# EAGLE board cleanup_test01.out (EAGLE 7.2.0)

Size 160 x 100 mm. Coordinates in mm from the lower left corner, seen from the top.
Outline: 0,0 160,0 160,100 0,100 0,0
Copper layers (1*16): Top 0.035mm / dielectric 1.5mm / Bottom 0.035mm
Design rules "default": minimum track width 10mil, minimum drill 0.6mm, track to track 8mil, track to pad 8mil, pad to pad 8mil, via to via 8mil, smd to smd 8mil, copper to edge 40mil, drill to drill 8mil, minimum pad ring 10mil, minimum via ring 8mil, stop-mask expansion 4mil, vias tented up to drill 0mil, thermal gap 10mil
Net classes: 1 power: width 0.305 mm

## Footprints (pad centres in the part's own frame; a part is rotated, then mirrored left to right if it is on the bottom)
FCI_10033526 = smd 2.25 x 0.5: 1 -3.85,-1.6; 2 -3.85,-0.8; 3 -3.85,0; 4 -3.85,0.8; 5 -3.85,1.6 | smd 2.5 x 2: 6 -3.85,4.35; 7 1.6,4.35; 8 1.6,-4.35; 9 -3.85,-4.35
CK_KMR211GLSR = smd 0.9 x 1: 1 -2.05,0.8; 2 -2.05,-0.8; 3 2.05,-0.8; 4 2.05,0.8 | smd 1.7 x 0.55: 5 0,1.425
QFP80P900X900X120-32L30HS = smd 0.55 x 1.6: 1 -2.8,-4.18; 2 -2,-4.18; 3 -1.2,-4.18; 4 -0.4,-4.18; 5 0.4,-4.18; 6 1.2,-4.18; 7 2,-4.18; 8 2.8,-4.18; 17 2.8,4.18; 18 2,4.18; 19 1.2,4.18; 20 0.4,4.18; 21 -0.4,4.18; 22 -1.2,4.18; 23 -2,4.18; 24 -2.8,4.18 | smd 1.6 x 0.55: 9 4.18,-2.8; 10 4.18,-2; 11 4.18,-1.2; 12 4.18,-0.4; 13 4.18,0.4; 14 4.18,1.2; 15 4.18,2; 16 4.18,2.8; 25 -4.18,2.8; 26 -4.18,2; 27 -4.18,1.2; 28 -4.18,0.4; 29 -4.18,-0.4; 30 -4.18,-1.2; 31 -4.18,-2; 32 -4.18,-2.8

## Placement (x,y rotation side)
JP1  USB-5PIN-CONN_USB-MINIB-MTH-POSTS  [FCI_10033526]  -48.26,6.35 0 top  (outside the outline)
SW1  PUSHBUTTON-SHIELD-GND_CK_KMR211GLSR-TACTILE  [CK_KMR211GLSR]  -59.69,25.4 0 top  (outside the outline)
U1  ATMEGA328-NO-THERMAL_32TQFP  [QFP80P900X900X120-32L30HS]  -43.18,17.78 0 top  (outside the outline)

## Library data of the parts
JP1 = NVSL; DIST1: DigiKey; DIST1PN: 609-4701-1-ND; MFR: FCI; MPN: 10033526-N3212MLF
SW1 = NVSL; DIST1: DigiKey; DIST1PN: 401-1426-1-ND; MFR: C&K; MPN: KMR211GLFS
U1 = NVSL; DIST1: DigiKey; DIST1PN: ATMEGA328-AU-ND; MFR: Atmel; MPN: ATMEGA328-AU

## Nets
A0: U1.23
A1: U1.24
A2: U1.25
A3: U1.26
A4: U1.27
A5: U1.28
A6: U1.19
AREF: U1.20
D3: U1.1
D4: U1.2
D5: U1.9
D6: U1.10
D7: U1.11
D8: U1.12
D9: U1.13
D10: U1.14
D11: U1.15
D13: U1.17
D+: JP1.3
D-: JP1.2
GND: JP1.5 SW1.1 SW1.4 SW1.5 U1.3 U1.5 U1.21
N$1: U1.4 U1.6
N$4: U1.8
N$5: U1.7
RST: SW1.2 SW1.3 U1.29
RXD: U1.30
VBUS: JP1.1
VCC: U1.18

## Tracks (layer width: path | path; a pad name or v marks a point on that pad's centre or on a via)
GND  (6 unrouted)
N$1  (1 unrouted)
RST  (2 unrouted)